# Altium PCB Converter.PcbDoc
Units mil, origin at the board's own origin, x right, y up, seen from the top; angles counter-clockwise.
Board outline 948.03 x 1063.03 mil, 2 copper layers (Top Layer, Bottom Layer); 15 components, 27 nets, 108 pads, 21 vias.
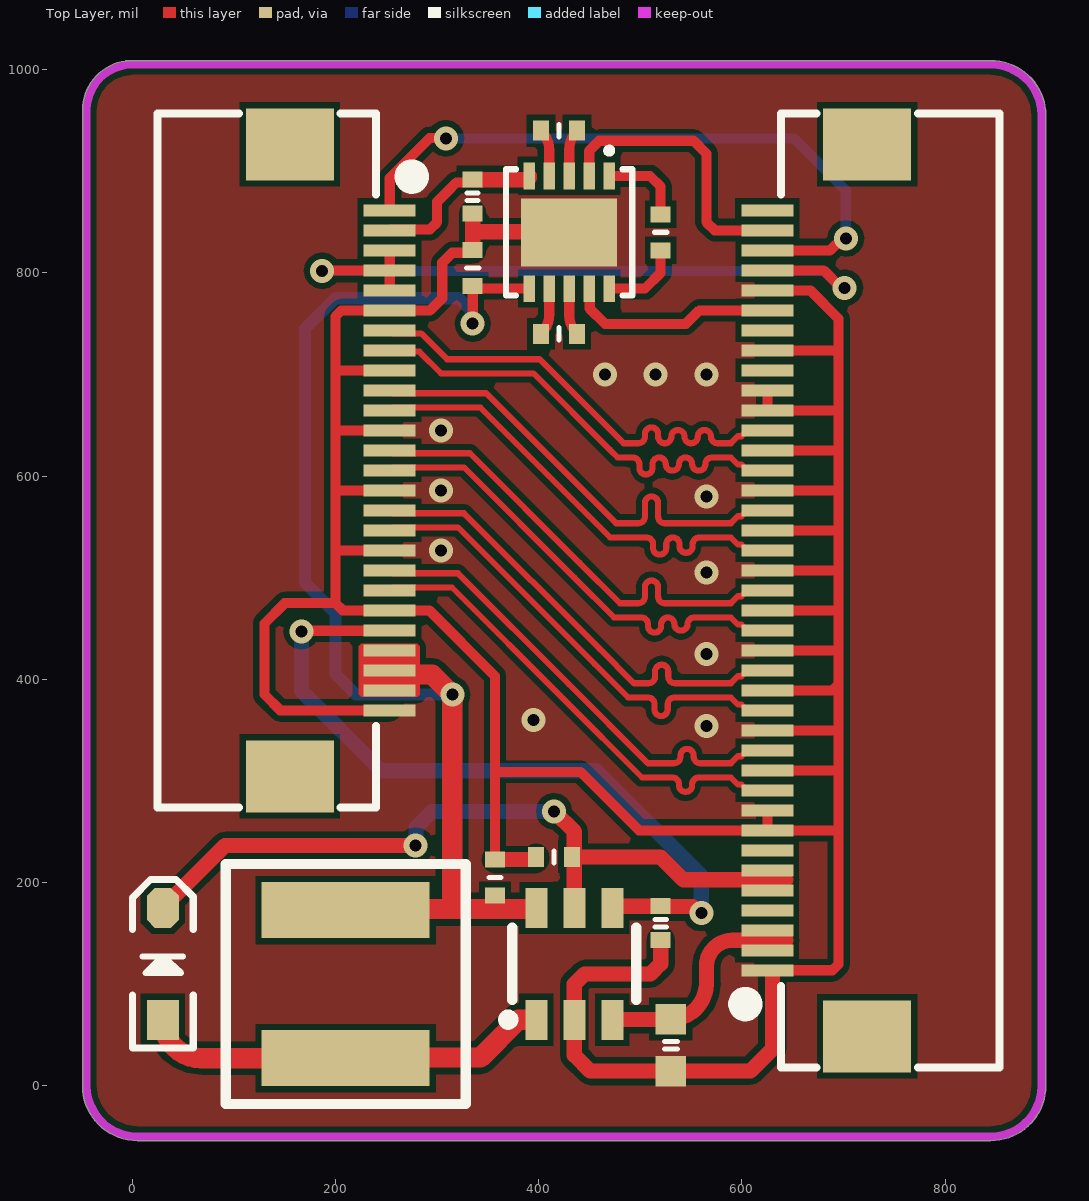
[diagram p0: Top Layer view]
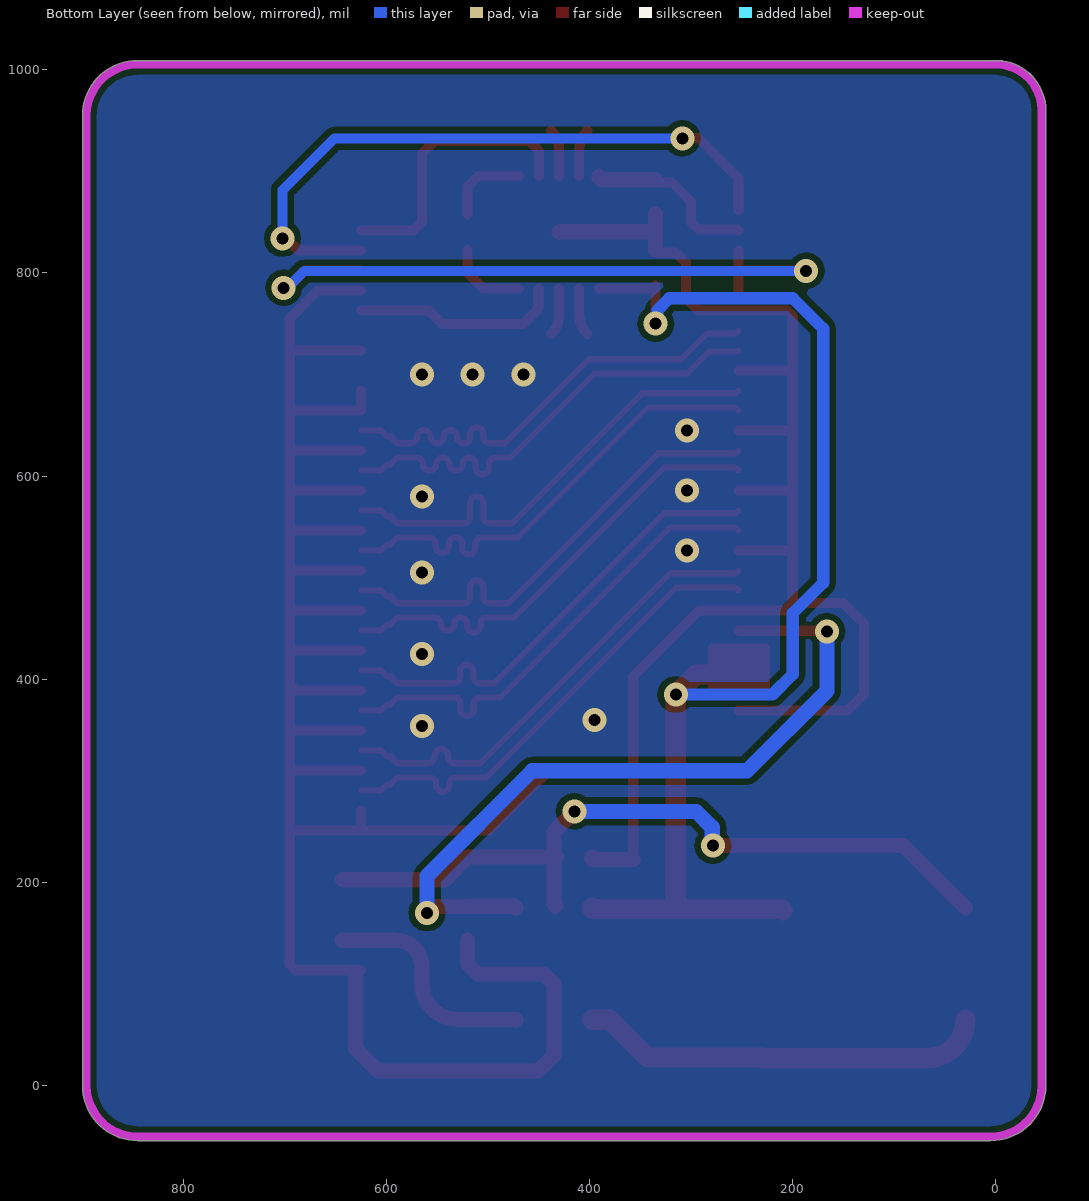
[diagram p1: Bottom Layer view, seen from below]
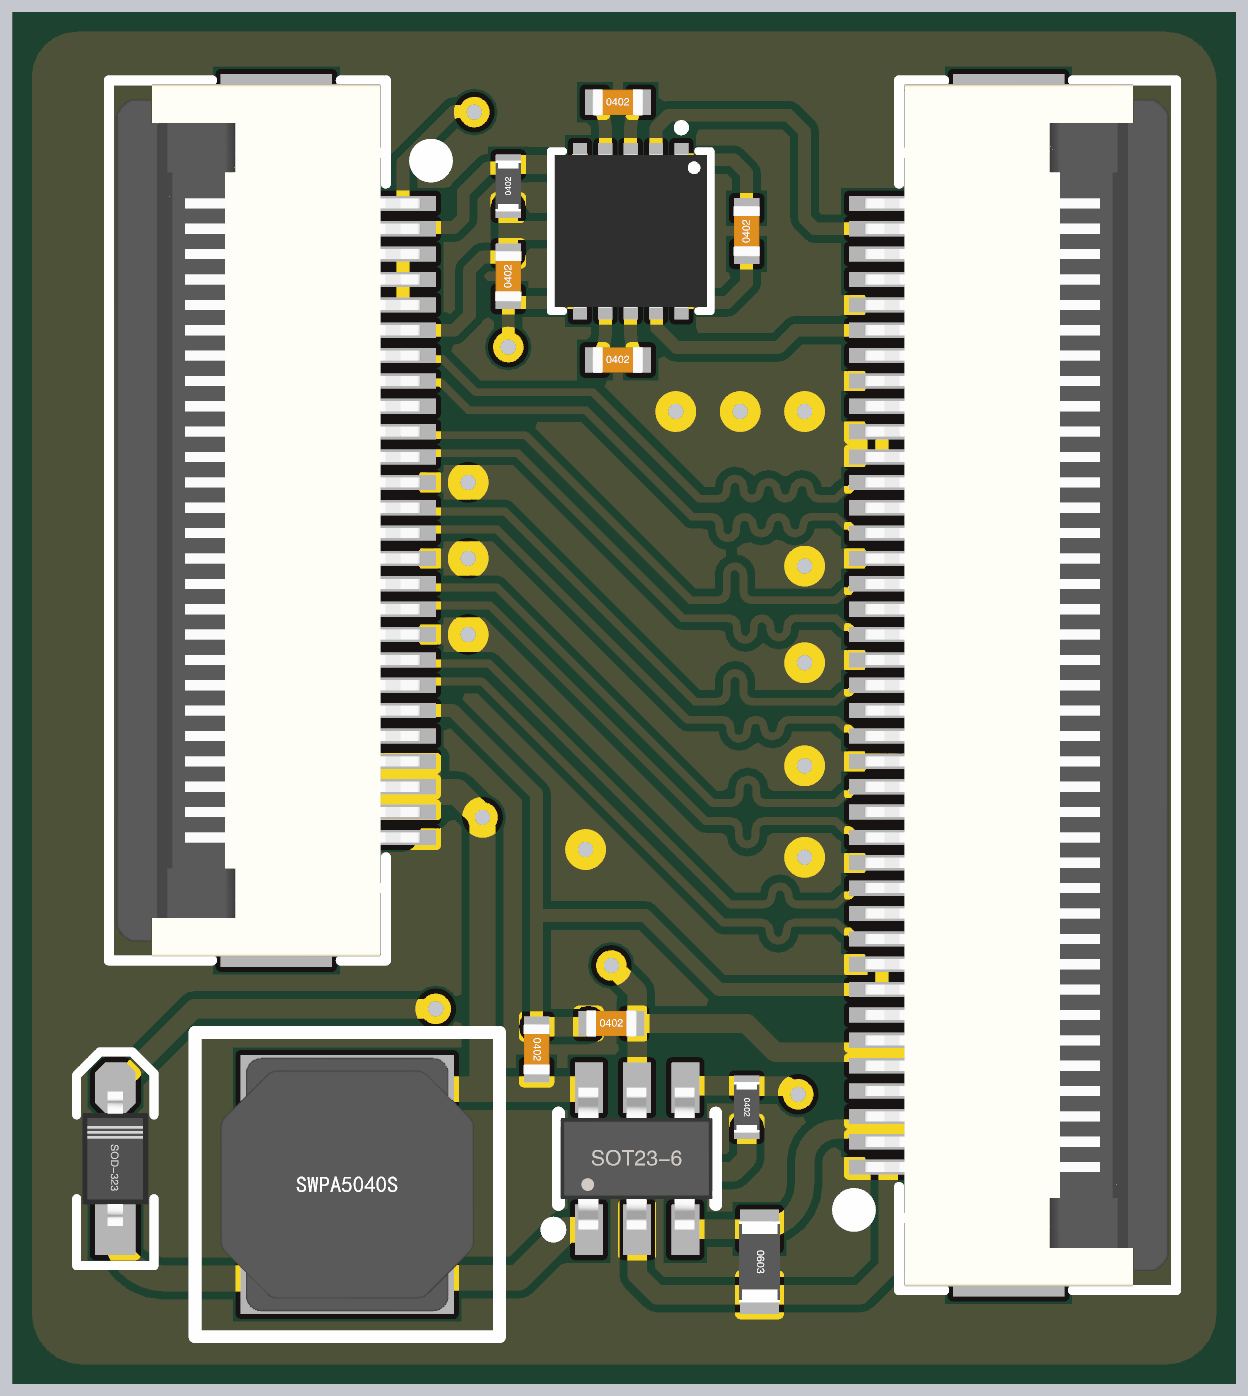
[diagram p2: 3D render of the assembled board from above, using the file's embedded part models]

## Layer stack, top to bottom
Top Solder: solder mask 0.4, Solder Resist, Dk 3.5
Top Layer: signal copper 1.4
Dielectric 1: dielectric 12.6, FR-4, Dk 4.8
Bottom Layer: signal copper 1.4
Bottom Solder: solder mask 0.4, Solder Resist, Dk 3.5

## Board outline
-49.02,0 -49.02,960 cw(c0,960) -6.92,1008.52 cw(c-5,1005) -5,1009.01 0.03,1009.01 825,1009.02 845,1009.02 cw(c845,955) 899.02,955 899.02,0 cw(c845,0) 845,-54.01 830,-54.01 5,-54.02 cw(c5.01,0.01)

## Design rules (kind name [scope] priority, off if disabled: settings)
Clearance [All] p1: gap=5 ignorepadtopadclearanceinfootprint=FALSE except(6: Arc-Fill Arc-Poly Arc-Region Track-Fill Track-Poly Track-Region SMDPad-Fill SMDPad-Poly SMDPad-Region THPad-Fill THPad-Poly THPad-Region Via-Fill Via-Poly Via-Region Fill-Fill Fill-Poly Fill-Region Poly-Poly Poly-Region Region-Region)
DiffPairsRouting [All] p1: maxlimit=8 minlimit=8 mostfreqgap=8 toplayer_minwidth=6 toplayer_maxwidth=15 toplayer_prefwidth=15 bottomlayer_minwidth=6 bottomlayer_maxwidth=15 bottomlayer_prefwidth=15 maxuncoupledlength=500
PlaneConnect [All] p1: planeconnectstyle=Direct reliefexpansion=20 reliefentries=4 reliefconductorwidth=10 reliefairgap=10
PolygonConnect [All] p1: connectstyle=Direct reliefconductorwidth=10 reliefentries=4 polygonreliefangle="90 Angle" airgapwidth=10
RoutingVias [All] p1: holewidth=28 width=50 viastyle="Through Hole" minholewidth=28 minwidth=50 maxholewidth=28 maxwidth=50
SolderMaskExpansion [All] p1: expansion=4 istentingtop=FALSE
Width [All] p1: maxlimit=20 minlimit=6 preferedwidth=10 minimp=50.000000 maximp=50.000000 favimp=50.000000
28 further rules are at their usual default settings.

## Classes and differential pairs
component class Converter: C1 C2 C3 C4 C5 C6 D1 FPC1 L1 R1 R2 R3 U1
differential pair MIPI_D3: +MIPI_D3_P -MIPI_D3_N
differential pair MIPI_D2: +MIPI_D2_P -MIPI_D2_N
differential pair MIPI_D1: +MIPI_D1_P -MIPI_D1_N
differential pair MIPI_D0: +MIPI_D0_P -MIPI_D0_N
differential pair MIPI_CLK: +MIPI_CLK_P -MIPI_CLK_N

## Components (designator, comment, footprint, x,y, rotation, side; value= is the part's Value field where it differs from the comment)
C1 "" C0402_L 335,805 r90 top
C2 "" C0402_L 420,940 r0 top
C3 "" C0402_L 420,740 r0 top
C4 "" C0402_L 520,840 r90 top
C5 "" C0402_L 357,204.88 r270 top
C6 "" C0402_L 415,225 r0 top
D1 "" SOD-323 30,120 r90 top
FPC1 "" "FPC0.5 2H-WS-26P" 155,615.47 r270 top
FPC2 "" "FPC0.5 2H-WS-39P" 723.31,487.52 r90 top locked
L1 "" SWPA5040 210,100 r270 top
R1 "" R0402_L 335,875 r90 top
R2 "" R0402_L 520,160 r270 top
R3 "" R0603_L 530,40 r270 top
U1 "" LP3102 430,840 r180 top
U2 "" RT9293BGJ6 435,120 r270 top

## Footprints (in the part's own frame and the unit in brackets; to place one, negate y for a bottom-side part, rotate by r counter-clockwise, add the part's x,y. Pads: shape width x height; smd on the part's side, far side on the other; paste and mask are expansions set on the pad)
C0402_L [mm] "无极性贴片电容"
  rect 0.4x0.5 smd: 1(-0.45,0) 2(0.45,0)
  silkscreen extent 0,-0.15 0,0.15, body extent -0.5,-0.26 0.5,0.26, height 0.54
"FPC0.5 2H-WS-26P" [mm] "长：17.2mm，宽：5.2mm，高：2mm"
  rect 1.8x2.2 smd: 0(-7.9,0) 0(7.9,0)
  rect 0.3x1.3 smd: 1(-6.25,2.497) 2(-5.75,2.497) 3(-5.25,2.497) 4(-4.75,2.497) 5(-4.25,2.497) 6(-3.75,2.497) 7(-3.25,2.497) 8(-2.75,2.497) 9(-2.25,2.497) 10(-1.75,2.497) 11(-1.25,2.497) 12(-0.75,2.497) 13(-0.25,2.497) 14(0.25,2.497) 15(0.75,2.497) 16(1.25,2.497) 17(1.75,2.497) 18(2.25,2.497) 19(2.75,2.497) 20(3.25,2.497) 21(3.75,2.497) 22(4.25,2.497) 23(4.75,2.497) 24(5.25,2.497) 25(5.75,2.497) 26(6.25,2.497)
  silkscreen extent -8.68,-3.3 8.68,3.23, body extent -8.6,-3.15 8.6,2.85, height 2
"FPC0.5 2H-WS-39P" [mm] "长：23.7mm，宽：5.2mm，高：2mm"
  rect 1.8x2.2 smd: 0(-11.15,0) 0(11.15,0)
  rect 0.3x1.3 smd: 1(-9.5,2.497) 2(-9,2.497) 3(-8.5,2.497) 4(-8,2.497) 5(-7.5,2.497) 6(-7,2.497) 7(-6.5,2.497) 8(-6,2.497) 9(-5.5,2.497) 10(-5,2.497) 11(-4.5,2.497) 12(-4,2.497) 13(-3.5,2.497) 14(-3,2.497) 15(-2.5,2.497) 16(-2,2.497) 17(-1.5,2.497) 18(-1,2.497) 19(-0.5,2.497) 20(0,2.497) 21(0.5,2.497) 22(1,2.497) 23(1.5,2.497) 24(2,2.497) 25(2.5,2.497) 26(3,2.497) 27(3.5,2.497) 28(4,2.497) 29(4.5,2.497) 30(5,2.497) 31(5.5,2.497) 32(6,2.497) 33(6.5,2.497) 34(7,2.497) 35(7.5,2.497) 36(8,2.497) 37(8.5,2.497) 38(9,2.497) 39(9.5,2.497)
  silkscreen extent -11.93,-3.3 11.92,3.23, body extent -11.85,-3.15 11.85,2.85, height 2
LP3102 [mm]
  rect 0.28x0.665 smd: 1(-1,-1.407) 2(-0.5,-1.407) 3(0,-1.407) 4(0.5,-1.407) 5(1,-1.407) 6(1,1.407) 7(0.5,1.407) 8(0,1.407) 9(-0.5,1.407) 10(-1,1.407)
  rect 2.4x1.7 smd: 11(0,0)
  silkscreen extent -1.58,-2.11 1.58,1.58, body extent -1.5,-1.51 1.5,1.51, height 0.76
R0402_L [mm] "1/16W贴片电阻"
  rect 0.4x0.5 smd: 1(-0.425,0) 2(0.425,0)
  silkscreen extent -0.09,-0.14 0.1,0.14, body extent -0.5,-0.25 0.5,0.25, height 0.3
R0603_L [mil] "1/10W贴片电阻"
  rect 30x30 smd: 1(-25.59,0) 2(25.59,0)
  silkscreen extent -4,-6 4,6, body extent -31,-16 32,16, height 16
RT9293BGJ6 [mm]
  rect 1x0.55 smd: 1(1.4,-0.95) 2(1.4,0) 3(1.4,0.95) 4(-1.4,0.95) 5(-1.4,0) 6(-1.4,-0.95)
  silkscreen extent -0.9,-1.78 1.52,1.55, body extent -1.41,-1.51 1.4,1.49, height 1.15
SOD-323 [mm] "1.8x1.3X0.9mm（长宽高，不包括引脚）"
  rect 1x0.8 smd: 1(-1.4,0)
  oct 1x0.8 smd: 2(1.4,0)
  silkscreen extent -2.11,-0.76 2.11,0.76, body extent -1.32,-0.65 1.32,0.65, height 0.95
SWPA5040 [mm] "轮廓5mm*5mm ，焊盘间距2.3mm"
  rect 1.4x4.2 smd: 1(-1.85,0) 2(1.85,0)
  silkscreen extent -3,-3 3,3, body extent -2.5,-2.5 2.5,2.5, height 4

## Part data
C1 C2 C3 C4 C5 C6: library part C, "贴片电容", BOM名称=无极性贴片电容, 联系卖家，免费查找封装=唯一出售店铺网址https://shop463601444.taobao.com
D1: library part 1N5819, "肖特基二极管", BOM名称=肖特基二极管, 联系卖家，免费查找封装=唯一出售店铺网址https://shop463601444.taobao.com
FPC1: library part FPC-26P, "FPC连接器", BOM名称=FPC连接器, 学习资源=www.ooocke.com, 版权归属=源创客
FPC2: library part LQ055T3SX02Z, "5.5寸显示屏", BOM名称=FPC连接器, 学习资源=www.ooocke.com, 版权归属=源创客
L1: library part L, "贴片小功率电感", BOM名称=小功率贴片电感, 封装库来自淘宝卖家ID：黄晶宝石=其他店铺购入均为盗版假冒封装库，请立即申请退款, 联系卖家，免费查找封装=唯一出售店铺网址https://shop463601444.taobao.com
R1 R2 R3: library part R, "贴片电阻", BOM名称=贴片电阻, 封装库来自淘宝卖家ID：黄晶宝石=其他店铺购入均为盗版假冒封装库，请立即申请退款, 联系卖家，免费查找封装=唯一出售店铺网址https://shop463601444.taobao.com
U1: library part LP3102QVF, "C517005"
U2: library part RT9293BGJ6, "异步升压的LED驱动器 C36462"

## Via types
v1: diameter 23.62, hole 11.81, Top Layer to Bottom Layer, 21 vias

## Nets (pads, with @x,y where several pads share a name; then routed paths per layer and width w, separated by ;. In a path a pad name is that pad's centre, name@x,y a point inside that pad or via, vN(x,y) a via of type N, cw(c..) or ccw(c..) an arc to the next point about the centre after c; other vN are vias at no path point)
GND: C1.2 C5.1 C6.1 FPC1.6 FPC1.9 FPC1.12 FPC1.15 FPC1.18 FPC1.21 FPC1.26 FPC2.1 FPC2.8 FPC2.9 FPC2.11 FPC2.13 FPC2.15 FPC2.17 FPC2.19 FPC2.21 FPC2.23 FPC2.25 FPC2.27 FPC2.29 FPC2.30 FPC2.32 FPC2.35 R1.1 R2.2 R3.2 U1.11 U2.2 | length 3938.4
  Top Layer w10: FPC1.26 145.59,369.41 130,385 130,455 150,475 200,475 ; FPC1.18 203.11,526.89 200,530 ; FPC1.15 200.94,585.94 200,585 ; FPC1.12 200,645 ; FPC1.9 200.94,704.06 200,705 ; C1.2 332.13,819.84 314.84,819.84 305,810 305,775 293.11,763.11 FPC1.6 205.86,763.11 200,757.25 200,705 ; C5.1 357,308.92 ; FPC2.1 625.12,113.62 689.14,113.62 695,119.48 695,250 ; FPC2.9 FPC2.8 ; FPC2.11 694.65,310.35 695,310 ; FPC2.13 694.72,349.72 695,350 ; FPC2.15 689.09,389.09 695,395 ; FPC2.17 693.46,428.46 695,430 ; FPC2.19 692.17,467.83 695,465 ; FPC2.21 692.2,507.2 695,510 ; FPC2.23 693.43,546.57 695,545 ; FPC2.25 694.06,585.94 695,585 ; FPC2.27 694.69,625.32 695,625 ; FPC2.30 FPC2.29 694.69,664.68 695,665 ; FPC2.32 691.26,723.74 695,720 ; FPC2.35 667.2,782.8 695,755 695,720 ; 200,475 200,530 ; 200,475 207.17,467.83 292.17,467.83 357,403 357,308.92 ; 200,530 200,585 ; 200,585 200,645 ; 200,645 200,705 ; 357,308.92 441.08,308.92 498.7,251.3 FPC2.8 ; FPC2.8 693.7,251.3 695,250 ; 695,250 695,310 ; 695,310 695,350 ; 695,350 695,395 ; 695,395 695,430 ; 695,430 695,465 ; 695,465 695,510 ; 695,510 695,545 ; 695,545 695,585 ; 695,585 695,625 ; 695,625 695,665 ; 695,665 695,720
  Top Layer w15: C1.2 335,840.49 ; R1.1 335,840.49 ; C5.1 396.85,222.59 397.28,223.03 C6.1 ; U1.11 429.51,840.49 335,840.49 ; R2.2 520,120 510,110 445,110 435,100 U2.2 435,30 450.59,14.41 R3.2 530.1,14.52 608.35,14.52 630,36.17 FPC2.1@630,109.12
  other v1: 565,353.98 395,360 565,425 565,505 303.88,526.92 565,580 303.88,586.03 303.88,645 465,700 515,700 565,700
LCD_EN: FPC1.2 R1.2 U1.5 | length 172.2
  Top Layer w10: FPC1.2 254.21,842.76 292.76,842.76 300,850 300,870 310,880 318.9,888.9 332.17,888.9 R1.2
  Top Layer w15: R1.2 388.64,891.73 390.63,893.72 U1.5
LCD_RST: FPC1.1 FPC2.37 | length 647.6
  Top Layer w10: FPC1.1 253.31,893.31 292.78,932.78 v1@308.59,932.78 ; FPC2.37 686.8,822.17 698.53,833.9 v1(702.21,833.9)
  Bottom Layer w10: v1(308.61,932.4) 651.11,932.4 702.21,881.29 v1(702.21,833.9)
LED+: C6.2 D1.2 FPC2.5 FPC2.6 U2.5 | length 759.2
  Top Layer w6: U2.5@433.86,176.27 U2.5
  Top Layer w15: D1.2 30,175.57 38.25,183.82 38.7,183.82 91.24,236.36 v1(278.7,236.36) ; v1(415,270) 435,250 C6.2@435,225 ; C6.2 C6.2@435,225 ; U2.5@433.86,176.27 433.09,177.04 435,178.95 C6.2@435,225 ; 643.15,202.65 542.35,202.65 520,225 C6.2@435,225
  Bottom Layer w15: v1(278.7,236.36) 279.29,236.95 279.29,254.29 295,270 v1(415,270)
LED-: FPC2.2 FPC2.3 R3.1 U2.3 | length 222.8
  Top Layer w15: U2.3 472.76,65.24 529.64,65.24 ccw(c529.64,100.6) 565,100.6 565,117.46 cw(c590.65,117.46) 590.65,143.12 643.37,143.12
MIPI_CLK_N: FPC1.14 FPC2.18 | length 472.8
  Top Layer w6: FPC1.14 256.15,608.47 326.53,608.47 434.95,500.05 474.17,460.83 485,460.83 501,460.83 cw(c501,454.33) 507.5,454.33 507.5,452.43 ccw(c514,452.43) 520.5,452.43 520.5,454.33 cw(c527,454.33) 533.5,454.33 ccw(c540,454.33) 546.5,454.33 cw(c553,454.33) 553,460.83 575,460.83 589.19,460.83 596.1,453.93 599.54,453.93 605.31,448.15 FPC2.18
MIPI_CLK_P: FPC1.13 FPC2.20 | length 472.8
  Top Layer w6: FPC1.13 256.15,622.47 332.33,622.47 439.9,514.9 479.96,474.83 495,474.83 498,474.83 ccw(c498,481.33) 504.5,481.33 504.5,490.66 cw(c511,490.66) 517.5,490.66 517.5,481.33 ccw(c524,481.33) 524,474.83 555,474.83 589.19,474.83 596.1,481.74 599.54,481.74 605.31,487.52 FPC2.20
MIPI_D0_N: FPC1.17 FPC2.14 | length 472.8
  Top Layer w6: FPC1.17 256.15,549.42 320.58,549.42 454.95,415.05 487.91,382.09 491.46,382.09 507.46,382.09 cw(c507.46,375.59) 513.96,375.59 513.96,370.35 ccw(c520.46,370.35) 526.96,370.35 526.96,375.59 cw(c533.46,375.59) 533.46,382.09 571.05,382.09 589.19,382.09 596.1,375.19 599.54,375.19 605.31,369.41 FPC2.14
MIPI_D0_P: FPC1.16 FPC2.16 | length 472.8
  Top Layer w6: FPC1.16 256.15,563.42 326.38,563.42 459.9,429.9 493.7,396.09 505,396.09 508,396.09 ccw(c508,402.59) 514.5,402.59 514.5,407.84 cw(c521,407.84) 527.5,407.84 527.5,402.59 ccw(c534,402.59) 534,396.09 569.73,396.09 589.19,396.09 596.1,403 599.54,403 605.31,408.78 FPC2.16
MIPI_D1_N: FPC1.11 FPC2.22 | length 472.8
  Top Layer w6: FPC1.11 256.15,667.53 342.47,667.53 470.43,539.57 490,539.57 506,539.57 cw(c506,533.07) 512.5,533.07 512.5,529.15 ccw(c519,529.15) 525.5,529.15 525.5,533.07 cw(c532,533.07) 538.5,533.07 538.5,531.02 ccw(c545,531.02) 551.5,531.02 551.5,533.07 cw(c558,533.07) 558,539.57 580,539.57 589.19,539.57 596.1,532.67 599.54,532.67 605.31,526.89 FPC2.22
MIPI_D1_P: FPC1.10 FPC2.24 | length 472.8
  Top Layer w6: FPC1.10 256.15,681.53 348.27,681.53 476.22,553.57 495,553.57 498,553.57 ccw(c498,560.07) 504.5,560.07 504.5,573.48 cw(c511,573.48) 517.5,573.48 517.5,560.07 ccw(c524,560.07) 524,553.57 570,553.57 589.19,553.57 596.1,560.48 599.54,560.48 605.31,566.26 FPC2.24
MIPI_D2_N: FPC1.8 FPC2.26 | length 472.5
  Top Layer w6: FPC1.8 254.56,722.48 282.52,722.48 304,701 395.01,701 470,626.01 477.69,618.32 492.5,618.32 cw(c492.5,611.82) 499,611.82 499,608.12 ccw(c505.5,608.12) 512,608.12 512,611.81 cw(c518.5,611.81) 525,611.81 ccw(c531.5,611.81) 538,611.81 cw(c544.5,611.82) 551,611.82 ccw(c557.5,611.81) 564,611.81 cw(c570.5,611.82) 570.5,618.32 589.19,618.32 596.1,611.41 599.54,611.41 599.9,611.04 605.31,605.63 FPC2.26
MIPI_D2_P: FPC1.7 FPC2.28 | length 472.8
  Top Layer w6: FPC1.7 256.21,740.52 284.28,740.52 309.8,715 400.81,715 483.49,632.32 495,632.32 498,632.32 ccw(c498,638.82) 504.5,638.82 504.5,641.46 cw(c511,641.46) 517.5,641.46 517.5,638.82 ccw(c524,638.82) 530.5,638.82 cw(c537,638.82) 543.5,638.82 ccw(c550,638.82) 556.5,638.82 cw(c563,638.82) 569.5,638.82 ccw(c576,638.82) 576,632.32 589.19,632.32 596.1,639.22 599.54,639.22 605.31,645 615.51,645 FPC2.28
MIPI_D3_N: FPC1.20 FPC2.10 | length 472.8
  Top Layer w6: FPC1.20 256.15,490.36 314.64,490.36 424.95,380.05 501.65,303.35 515.5,303.35 531.5,303.35 cw(c531.5,296.85) 538,296.85 538,295.68 ccw(c544.5,295.68) 551,295.68 551,296.85 cw(c557.5,296.85) 557.5,303.35 583.75,303.35 589.19,303.35 596.1,296.45 599.54,296.45 605.31,290.67 FPC2.10
MIPI_D3_P: FPC1.19 FPC2.12 | length 472.8
  Top Layer w6: FPC1.19 256.15,504.36 320.44,504.36 429.9,394.9 507.44,317.35 530,317.35 533,317.35 ccw(c533,323.85) 539.5,323.85 539.5,325.03 cw(c546,325.03) 552.5,325.03 552.5,323.85 ccw(c559,323.85) 559,317.35 589.19,317.35 596.1,324.26 599.54,324.26 605.31,330.04 FPC2.12
NetC2_1: C2.1 U1.4 | length 46.7
  Top Layer w10: C2.1 cw(c382.89,920.61) 410.31,920.61 U1.4
NetC2_2: C2.2 U1.3 | length 46.6
  Top Layer w10: U1.3 430,921.38 cw(c456.33,921.38) C2.2
NetC3_1: C3.1 U1.7 | length 46.7
  Top Layer w10: C3.1 ccw(c382.89,759.39) 410.31,759.39 U1.7
NetC3_2: C3.2 U1.8 | length 46.7
  Top Layer w10: U1.8 430,758.62 ccw(c456.33,758.62) C3.2
NetC4_1: C4.1 U1.10 | length 79.3
  Top Layer w10: U1.10 504.59,784.59 520,800 C4.1
NetC4_2: C4.2 U1.1 | length 82.2
  Top Layer w10: U1.1 509.59,895.41 520,885 C4.2
NetD1_1: D1.1 L1.2 U2.1 | length 404.8
  Top Layer w20: D1.1 ccw(c67.72,64.88) 67.72,27.17 L1.2 230,27.17 230.51,27.68 342.68,27.68 379.88,64.88 U2.1
TIMER2_CH0: FPC1.22 R2.1 U2.4 | length 742.4
  Top Layer w10: v1(166.41,447.28) 166.85,447.71 252.87,447.71 FPC1.22
  Top Layer w15: U2.4 474.01,176.73 R2.1 520.37,176.36 551.31,176.36 557.67,170 v1(560,170)
  Bottom Layer w15: v1(166.41,447.28) 166.41,388.59 245,310 456.36,310 560,206.36 v1(560,170)
VCC_1V8: FPC1.3 FPC1.4 FPC1.5 FPC2.36 | length 710.7
  Top Layer w10: v1(186.74,801.94) 187.01,802.21 253.04,802.21 FPC1.4 ; FPC1.5 FPC1.4 ; FPC1.3 FPC1.4 ; FPC2.36 680.43,802.48 697.69,785.22 v1(701.09,785.22)
  Bottom Layer w10: v1(186.74,801.94) 680.68,801.94 697.41,785.22 v1(701.09,785.22)
VCC_3V3: C1.1 C5.2 FPC1.23 FPC1.24 FPC1.25 L1.1 U1.6 U2.6 | length 1235.5
  Top Layer w10: v1(335,750) C1.1 337.7,784.59 U1.6
  Top Layer w20: L1.1 211.14,173.98 315,173.98 ; FPC1.24 257.4,404.68 295.31,404.68 v1(315,385) 315,173.98 ; U2.6 397.6,174.81 396.78,173.98 315,173.98
  Bottom Layer w12: v1(315,385) 220,385 200,405 200,465 170,495 170,745 200,775 321.47,775 333.19,763.28 333.19,752.79 335,750.98 v1(335,750)
VSN: FPC2.38 U1.2 | length 280.2
  Top Layer w10: U1.2 449.69,920.11 459.58,930 552.48,930 565,917.48 565,850 573.15,841.85 FPC2.38
VSP: FPC2.34 U1.9 | length 206.5
  Top Layer w10: U1.9 450.2,784.08 450.2,764.8 465.16,749.84 544.84,749.84 558.11,763.11 FPC2.34
pads on no net: FPC1.0 FPC2.0 FPC2.4 FPC2.7 FPC2.31 FPC2.33 FPC2.39

## Polygon pours and split planes (outlines as drawn)
GND on Top Layer "GND_L01_P000" (solid, pour order 0): -49.02,0 -49.02,960 cw(c0,960) -6.92,1008.52 cw(c-5,1005) -5,1009.01 0.03,1009.01 825,1009.02 845,1009.02 cw(c845,955) 899.02,955 899.02,0 cw(c845,0) 845,-54.01 830,-54.01 5,-54.02 cw(c5.01,0.01)
GND on Bottom Layer "GND_L02_P001" (solid, pour order 1): -49.02,0 -49.02,960 cw(c0,960) -6.92,1008.52 cw(c-5,1005) -5,1009.01 0.03,1009.01 825,1009.02 845,1009.02 cw(c845,955) 899.02,955 899.02,0 cw(c845,0) 845,-54.01 830,-54.01 5,-54.02 cw(c5.01,0.01)

## Keep-outs
Keep-Out Layer:
  lines w8: -45,885 -45,960 cw(c0,960) 0,1005 ; -45,945 -45,0 ccw(c5,0) 5,-50 830,-50 845,-50 ccw(c845,0) 895,0 895,955 ccw(c845,955) 845,1005 825,1005 ; -5,1005 840,1005

## Other copper
Top Layer:
  region net VCC_3V3: 222.71,432.44 225.27,435 280.59,435 282.93,432.66 282.93,384.68 281.12,382.88 225.39,382.88 222.71,385.13

## Silkscreen, mask and mechanical layers (free items; w line width, h text height)
Mechanical 1:
  lines w8: -45,885 -45,960 cw(c0,960) 0,1005 ; -45,945 -45,0 ccw(c5,0) 5,-50 830,-50 845,-50 ccw(c845,0) 895,0 895,955 ccw(c845,955) 845,1005 825,1005 ; -5,1005 840,1005